# EAGLE board LickSensor_V2 (EAGLE 9.4.2)
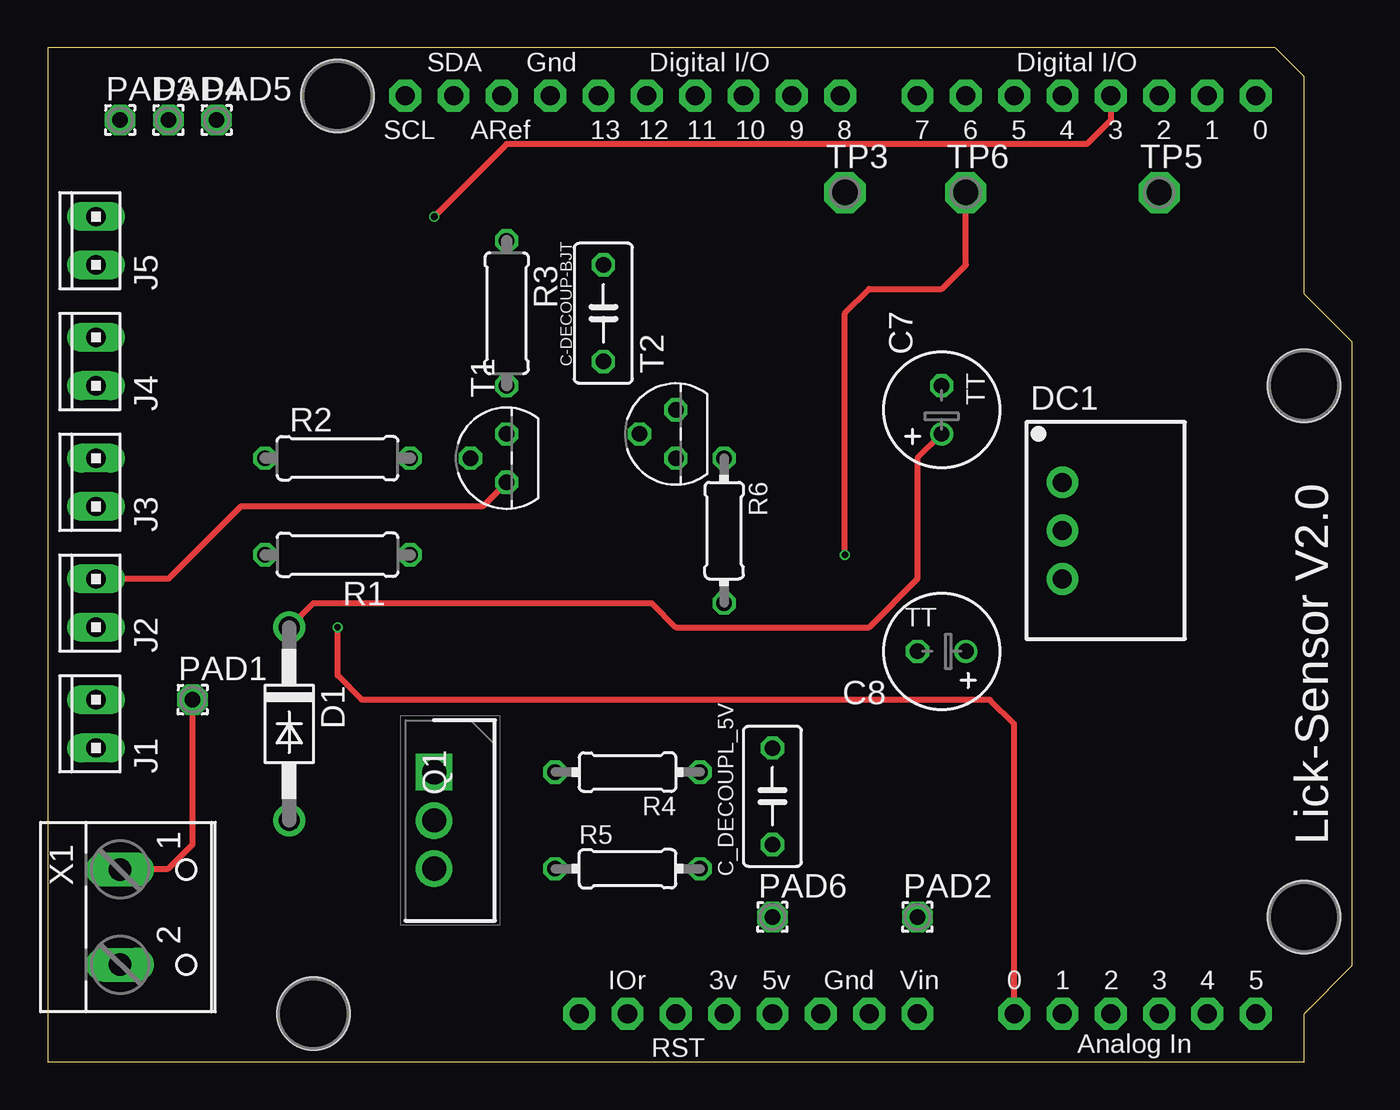
[diagram p0: board, top side]
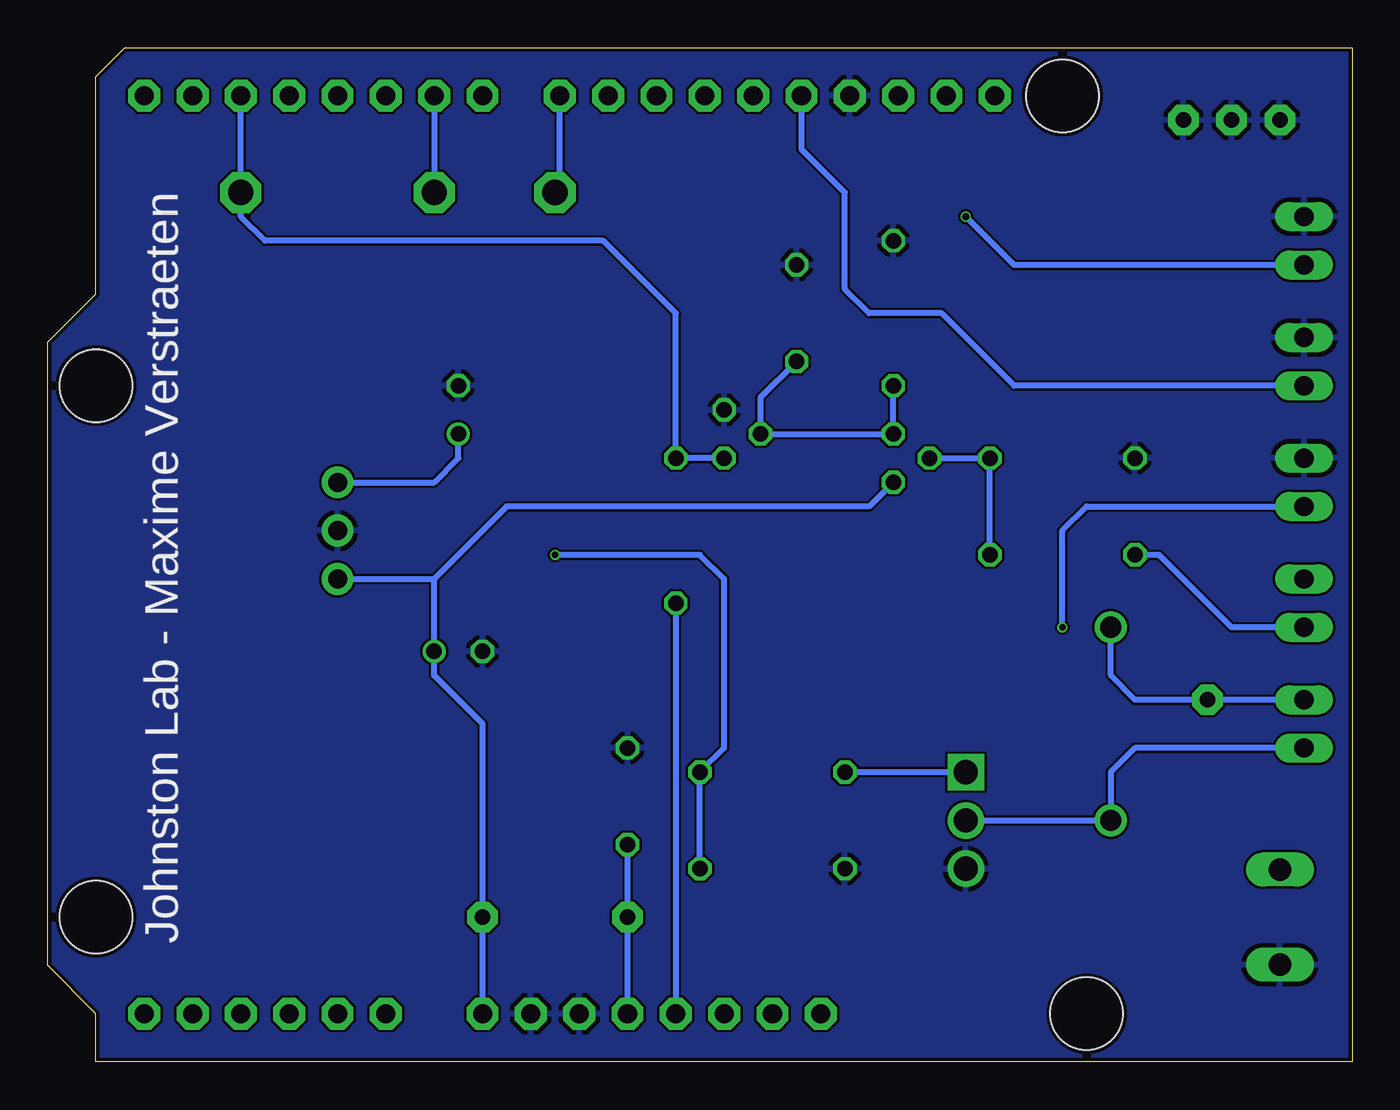
[diagram p1: board, bottom side, seen from below]

Size 68.58 x 53.34 mm. Coordinates in mm from the lower left corner, seen from the top.
Copper layers (1*16): Top 0.035559375mm / dielectric 1.6mm / Bottom 0.035559375mm
Design rules "jlcpcb2layer": minimum track width 5mil, minimum drill 12mil, track to track 5mil, track to pad 5mil, pad to pad 5mil, via to via 5mil, smd to smd 5mil, copper to edge 8mil, drill to drill 6mil, minimum pad ring 5mil, minimum via ring 3mil, stop-mask expansion 2.5mil, vias tented up to drill 0mil, thermal gap 10mil
Holes 3.81 mm at 15.24,50.8 66.04,35.56 66.04,7.62 13.97,2.54

## Footprints (pad centres in the part's own frame; a part is rotated, then mirrored left to right if it is on the bottom)
TT2D6 = drill 0.813: + -1.27,0 | drill 0.813 octagon: - 1.27,0
C050-030X075 = drill 0.813 octagon: 1 -2.54,0; 2 2.54,0
DO41-10 = drill 1.118: A 5.08,0; C -5.08,0
SIP3 = drill 1 pad 1.676: 1 -2.54,0; 2 0,0; 3 2.54,0
10X02MTA = drill 1.016 long: 1 1.27,0; 2 -1.27,0
1,6/0,8 = drill 0.813 pad 1.6 octagon: 1 0,0
TO254P469X1042X1967-3P = drill 1.28 pad 1.92 square: 1 0,0 | drill 1.28 pad 1.92: 2 2.54,0; 3 5.08,0
0207/7 = drill 0.813 octagon: 1 -3.81,0; 2 3.81,0
0204/7 = drill 0.813 octagon: 1 -3.81,0; 2 3.81,0
TO92 = drill 0.813 octagon: 1 1.27,0; 2 0,1.905; 3 -1.27,0
P1-13 = drill 1.321 pad 2.159 octagon: TP 0,0
ARDUINOR3 = drill 1 pad 1.676 octagon: 3V 35.56,2.54; 5V 38.1,2.54; A0 50.8,2.54; A1 53.34,2.54; A2 55.88,2.54; A3 58.42,2.54; A4 60.96,2.54; A5 63.5,2.54; AREF 23.876,50.8; D0 63.5,50.8; D1 60.96,50.8; D2 58.42,50.8; D3 55.88,50.8; D4 53.34,50.8; D5 50.8,50.8; D6 48.26,50.8; D7 45.72,50.8; D8 41.656,50.8; D9 39.116,50.8; D10 36.576,50.8; D11 34.036,50.8; D12 31.496,50.8; D13 28.956,50.8; GND 26.416,50.8; GND1 43.18,2.54; GND2 40.64,2.54; IOREF 30.48,2.54; RESERVED 27.94,2.54; RESET 33.02,2.54; SCL 18.796,50.8; SDA 21.336,50.8; VIN 45.72,2.54
W237-102 = drill 1.194 long: 1 -2.5,-1.27; 2 2.5,-1.27

## Placement (x,y rotation side)
C7  [TT2D6]  46.99,34.29 90 top
C8  [TT2D6]  46.99,21.59 180 top
C-DECOUP-BJT  10pF  [C050-030X075]  29.21,39.37 90 top
C_DECOUPL_5V  2.2µF  [C050-030X075]  38.1,13.97 90 top
D1  1N4004  [DO41-10]  12.7,17.78 270 top
DC1  R-78C9.0-1.0  [SIP3]  53.34,27.94 270 top
J1  [10X02MTA]  2.54,17.78 90 top
J2  [10X02MTA]  2.54,24.13 90 top
J3  [10X02MTA]  2.54,30.48 90 top
J4  [10X02MTA]  2.54,36.83 90 top
J5  [10X02MTA]  2.54,43.18 90 top
PAD1  [1,6/0,8]  7.62,19.05 0 top
PAD2  [1,6/0,8]  45.72,7.62 0 top
PAD3  [1,6/0,8]  3.81,49.53 0 top
PAD4  [1,6/0,8]  6.35,49.53 0 top
PAD5  [1,6/0,8]  8.89,49.53 0 top
PAD6  [1,6/0,8]  38.1,7.62 0 top
Q1  IRL540NPBF  [TO254P469X1042X1967-3P]  20.32,15.24 270 top
R1  10M  [0207/7]  15.24,26.67 180 top
R2  10M  [0207/7]  15.24,31.75 0 top
R3  47k  [0207/7]  24.13,39.37 270 top
R4  100  [0204/7]  30.48,15.24 180 top
R5  1M  [0204/7]  30.48,10.16 0 top
R6  [0204/7]  35.56,27.94 270 top
T1  BC547  [TO92]  24.13,31.75 90 top
T2  BC547  [TO92]  33.02,33.02 90 top
TP3  TPPAD1-13  [P1-13]  41.91,45.72 0 top
TP5  TPPAD1-13  [P1-13]  58.42,45.72 0 top
TP6  TPPAD1-13  [P1-13]  48.26,45.72 0 top
U1  ARDUINOR3-DIMENSION  [ARDUINOR3]  0,0 0 top
X1  [W237-102]  5.08,7.62 270 top

## Library data of the parts
C7 C8 C-DECOUP-BJT C_DECOUPL_5V = rcl; SPICEPREFIX: C
D1 = diode
DC1 = dc-dc-converter
J1-J5 = con-amp
PAD1-PAD6 = wirepad
Q1 = SamacSys_Parts; ALLIED_NUMBER: 70017094; ALLIED_PRICE-STOCK: http://www.alliedelec.com/international-rectifier-irl540npbf/70017094/; DESCRIPTION: N-channel MOSFET,IRL540N 30A 100V; HEIGHT: 4.69mm; MANUFACTURER_NAME: International Rectifier; MANUFACTURER_PART_NUMBER: IRL540NPBF; MOUSER_PART_NUMBER: 942-IRL540NPBF; MOUSER_PRICE-STOCK: http://www.mouser.com/Search/ProductDetail.aspx?qs=9%252bKlkBgLFf0uZBCvyYsQoQ%3d%3d; RS_PART_NUMBER: 2509056052; RS_PRICE-STOCK: http://uk.rs-online.com/web/p/products/2509056052
R1-R6 = rcl; SPICEPREFIX: R
T1 T2 = transistor
TP3 TP5 TP6 = testpad
U1 = adafruit
X1 = con-wago-500; MPN: 237-102; OC_FARNELL: unknown; OC_NEWARK: 70K9898

## Nets
5V: C_DECOUPL_5V.1 PAD6.1 U1.5V
+3V3: R6.2 U1.3V
+9V: C8.+ DC1.3 J2.1 PAD2.1 T1.3 U1.VIN
+24V: C7.+ D1.C DC1.1 J1.1 PAD1.1 X1.1
BNC+: J5.2 U1.D3
BUTTON+: J4.2 U1.D13
D8TEST: TP3.TP U1.D8
GND: C7.- C8.- C-DECOUP-BJT.2 C_DECOUPL_5V.2 DC1.2 J3.1 J4.1 J5.1 PAD3.1 PAD4.1 PAD5.1 Q1.3 R2.1 R3.1 R5.1 T2.1 U1.GND U1.GND1 U1.GND2 X1.2
LICK_IN: R6.1 T2.3 TP5.TP U1.D2
N$4: Q1.1 R4.2
N$7: D1.A J1.2 Q1.2
N$10: C-DECOUP-BJT.1 R3.2 T1.1 T2.2
N$11: R1.1 R2.2 T1.2
SENSOR-: J2.2 R1.2
SWITCH_INPUT: J3.2 U1.A0
VALVE_OUT: R4.1 R5.2 TP6.TP U1.D6

## Tracks (layer width: path | path; a pad name or v marks a point on that pad's centre or on a via)
5V
  Bottom 0.305: U1.5V PAD6.1 C_DECOUPL_5V.1
+3V3
  Bottom 0.305: R6.2 U1.3V
+9V
  Top 0.305: T1.3 22.86,29.21 10.16,29.21 6.35,25.4 J2.1
  Bottom 0.305: U1.VIN PAD2.1 45.72,17.78 48.26,20.32 C8.+ 48.26,25.4 | T1.3 25.4,29.21 44.45,29.21 48.26,25.4 | DC1.3 48.26,25.4
+24V
  Top 0.305: X1.1 3.85,10.16 6.35,10.16 7.62,11.43 PAD1.1 | D1.C 13.97,24.13 31.75,24.13 33.02,22.86 43.18,22.86 45.72,25.4 45.72,31.75 C7.+
  Bottom 0.305: J1.1 PAD1.1 11.43,19.05 12.7,20.32 D1.C | DC1.1 48.26,30.48 46.99,31.75 C7.+
BNC+  (via drill 0.35)
  Top 0.305: U1.D3 55.88,49.53 54.61,48.26 24.13,48.26 v20.32,44.45
  Bottom 0.305: J5.2 17.78,41.91 v20.32,44.45
BUTTON+
  Bottom 0.305: J4.2 17.78,35.56 21.59,39.37 25.4,39.37 26.67,40.64 26.67,45.72 28.96,48.01 U1.D13
D8TEST
  Bottom 0.305: TP3.TP 41.66,45.97 U1.D8
GND
  pour Bottom: 0,53.34 0,0 66.04,0 66.04,2.54 68.58,5.08 68.58,38.1 66.04,40.64 66.04,50.8 66.04,52.07 64.77,53.34
LICK_IN
  Bottom 0.305: U1.D2 TP5.TP 58.42,44.45 57.15,43.18 39.37,43.18 35.56,39.37 R6.1 T2.3
N$4
  Bottom 0.305: R4.2 Q1.1
N$7
  Bottom 0.305: J1.2 11.43,16.51 12.7,15.24 D1.A Q1.2
N$10
  Bottom 0.305: C-DECOUP-BJT.1 31.12,34.92 T2.2 T1.1 R3.2
N$11
  Bottom 0.305: R1.1 R2.2 T1.2
SENSOR-
  Bottom 0.305: J2.2 6.35,22.86 10.16,26.67 R1.2
SWITCH_INPUT  (via drill 0.35)
  Top 0.305: U1.A0 50.8,17.78 49.53,19.05 16.51,19.05 15.24,20.32 v15.24,22.86
  Bottom 0.305: v15.24,22.86 15.24,27.94 13.97,29.21 J3.2
VALVE_OUT  (via drill 0.35)
  Top 0.305: v41.91,26.67 41.91,39.37 43.18,40.64 46.99,40.64 48.26,41.91 TP6.TP
  Bottom 0.305: R5.2 R4.1 33.02,16.51 33.02,25.4 34.29,26.67 v41.91,26.67 | U1.D6 TP6.TP

## Text on the board
tPlace: Lick-Sensor V2.0
bPlace: Johnston Lab - Maxime Verstraeten